# Altium PCB stm32f107rct7_devbrd.PcbDoc
Units mm, origin at the board's own origin, x right, y up, seen from the top; angles counter-clockwise.
Board outline 80 x 80 mm, 2 copper layers (Top Layer, Bottom Layer); 39 components, 65 nets, 217 pads, 18 vias.
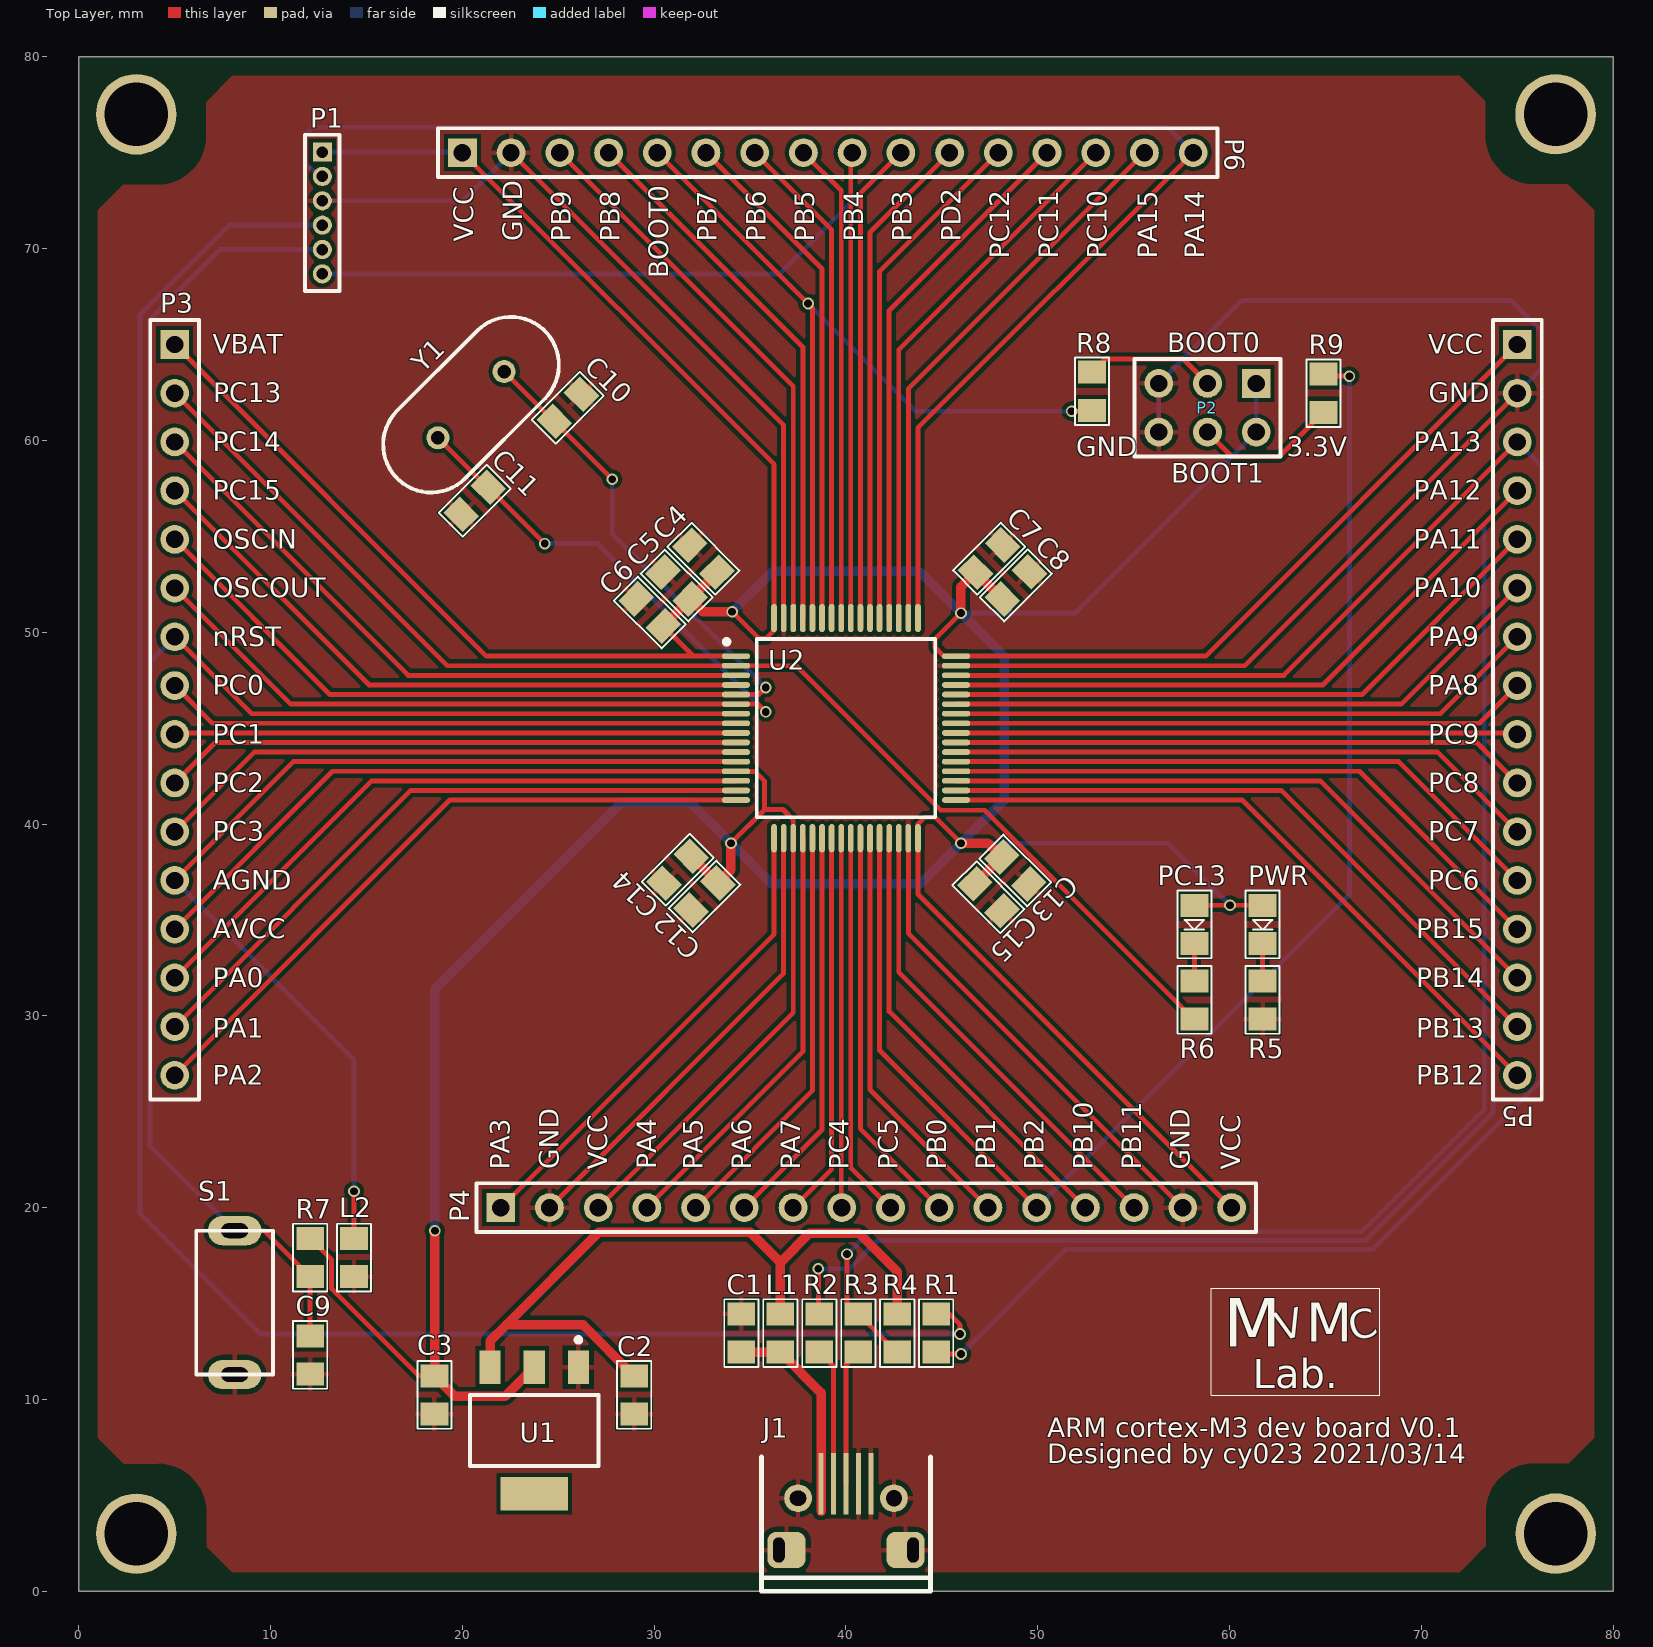
[diagram p0: Top Layer view]
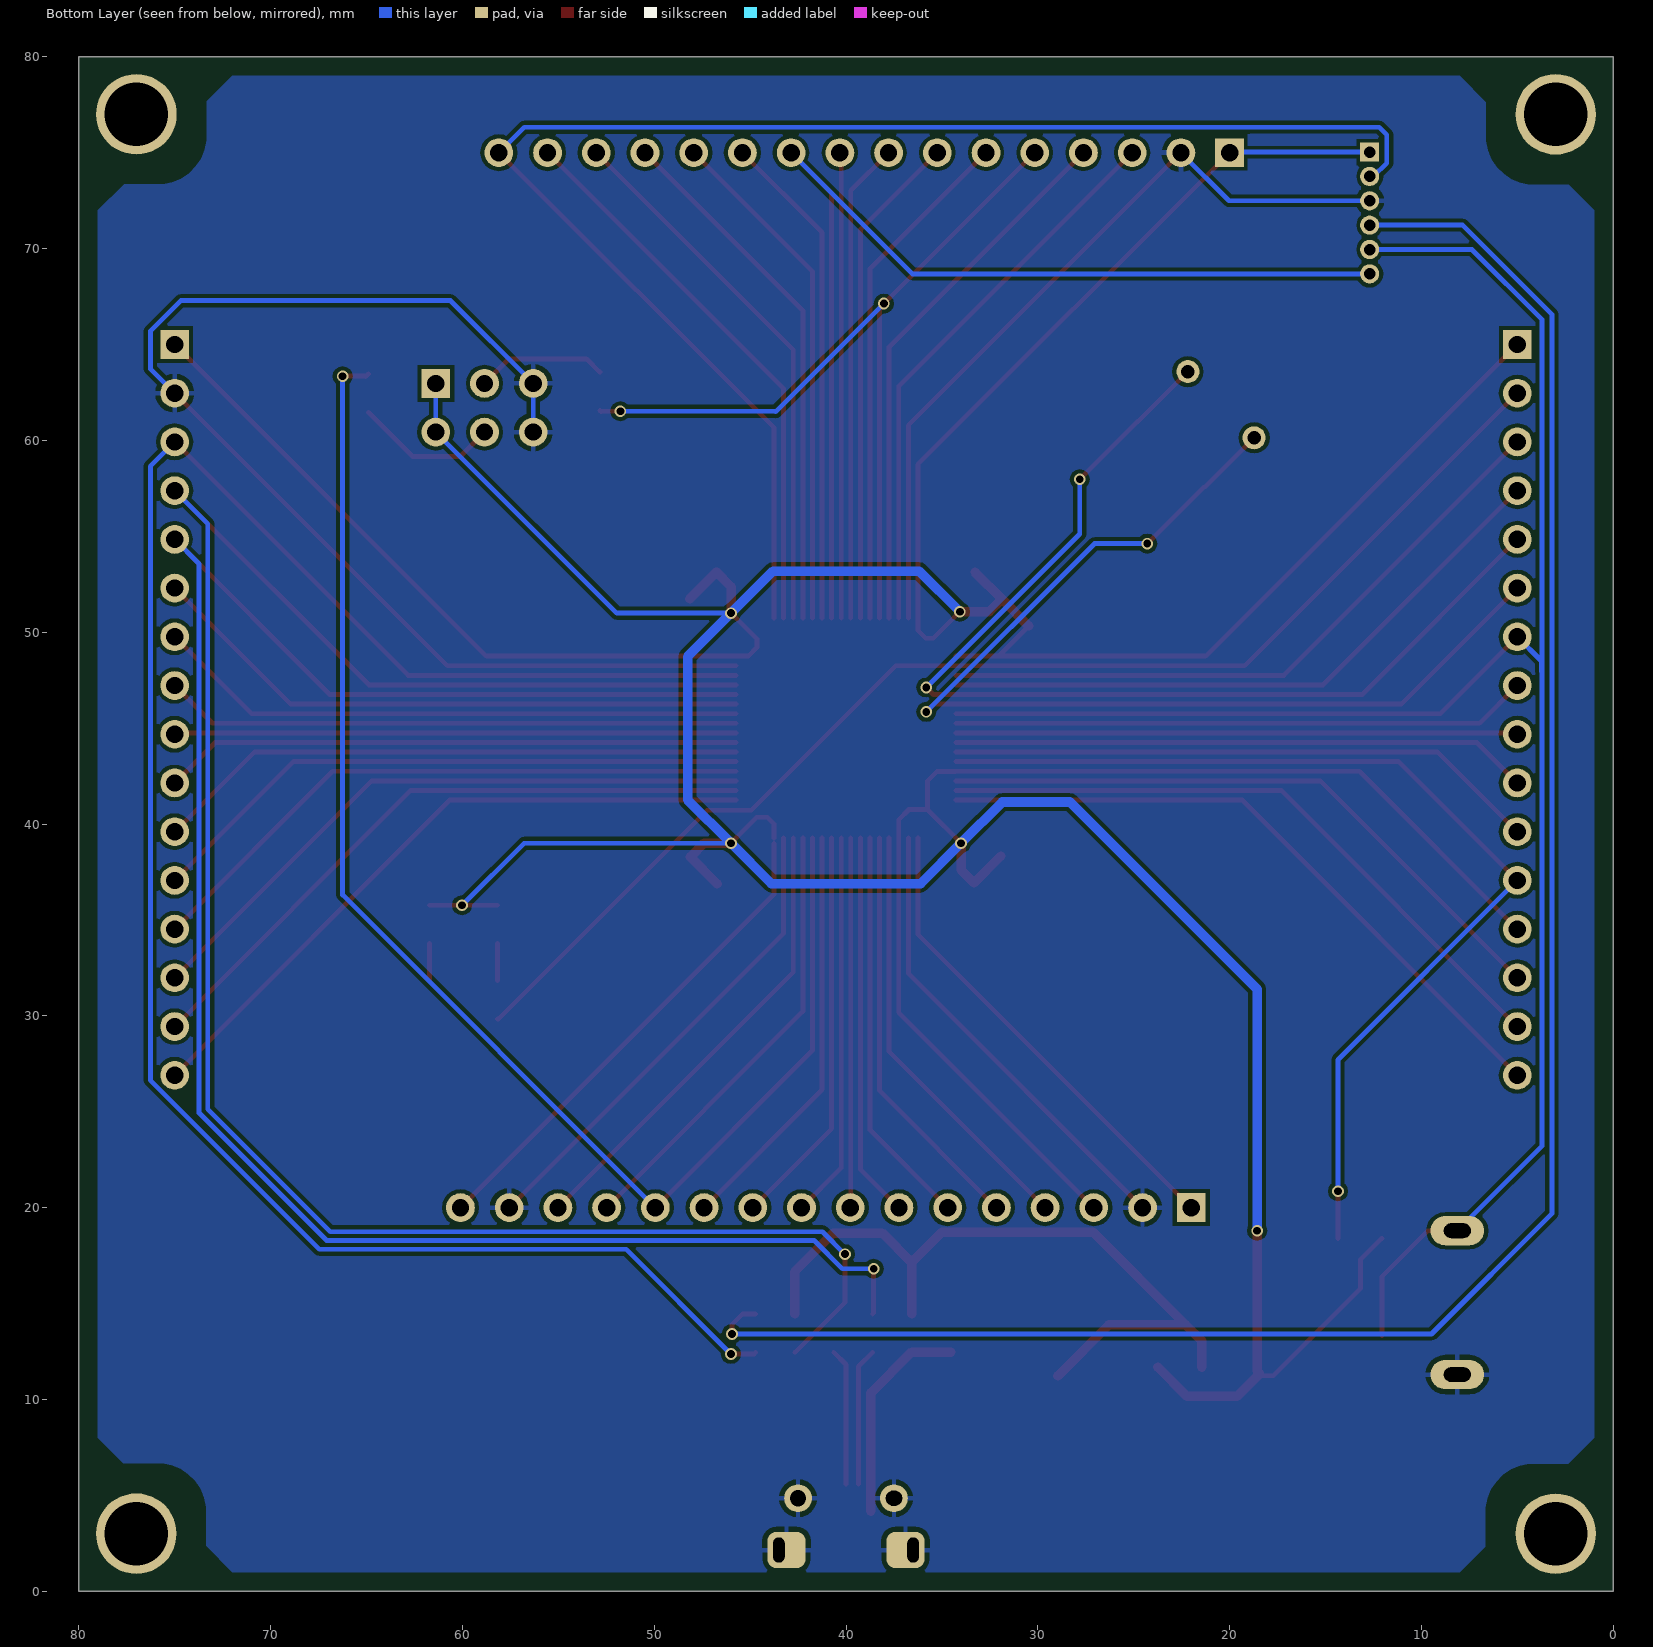
[diagram p1: Bottom Layer view, seen from below]
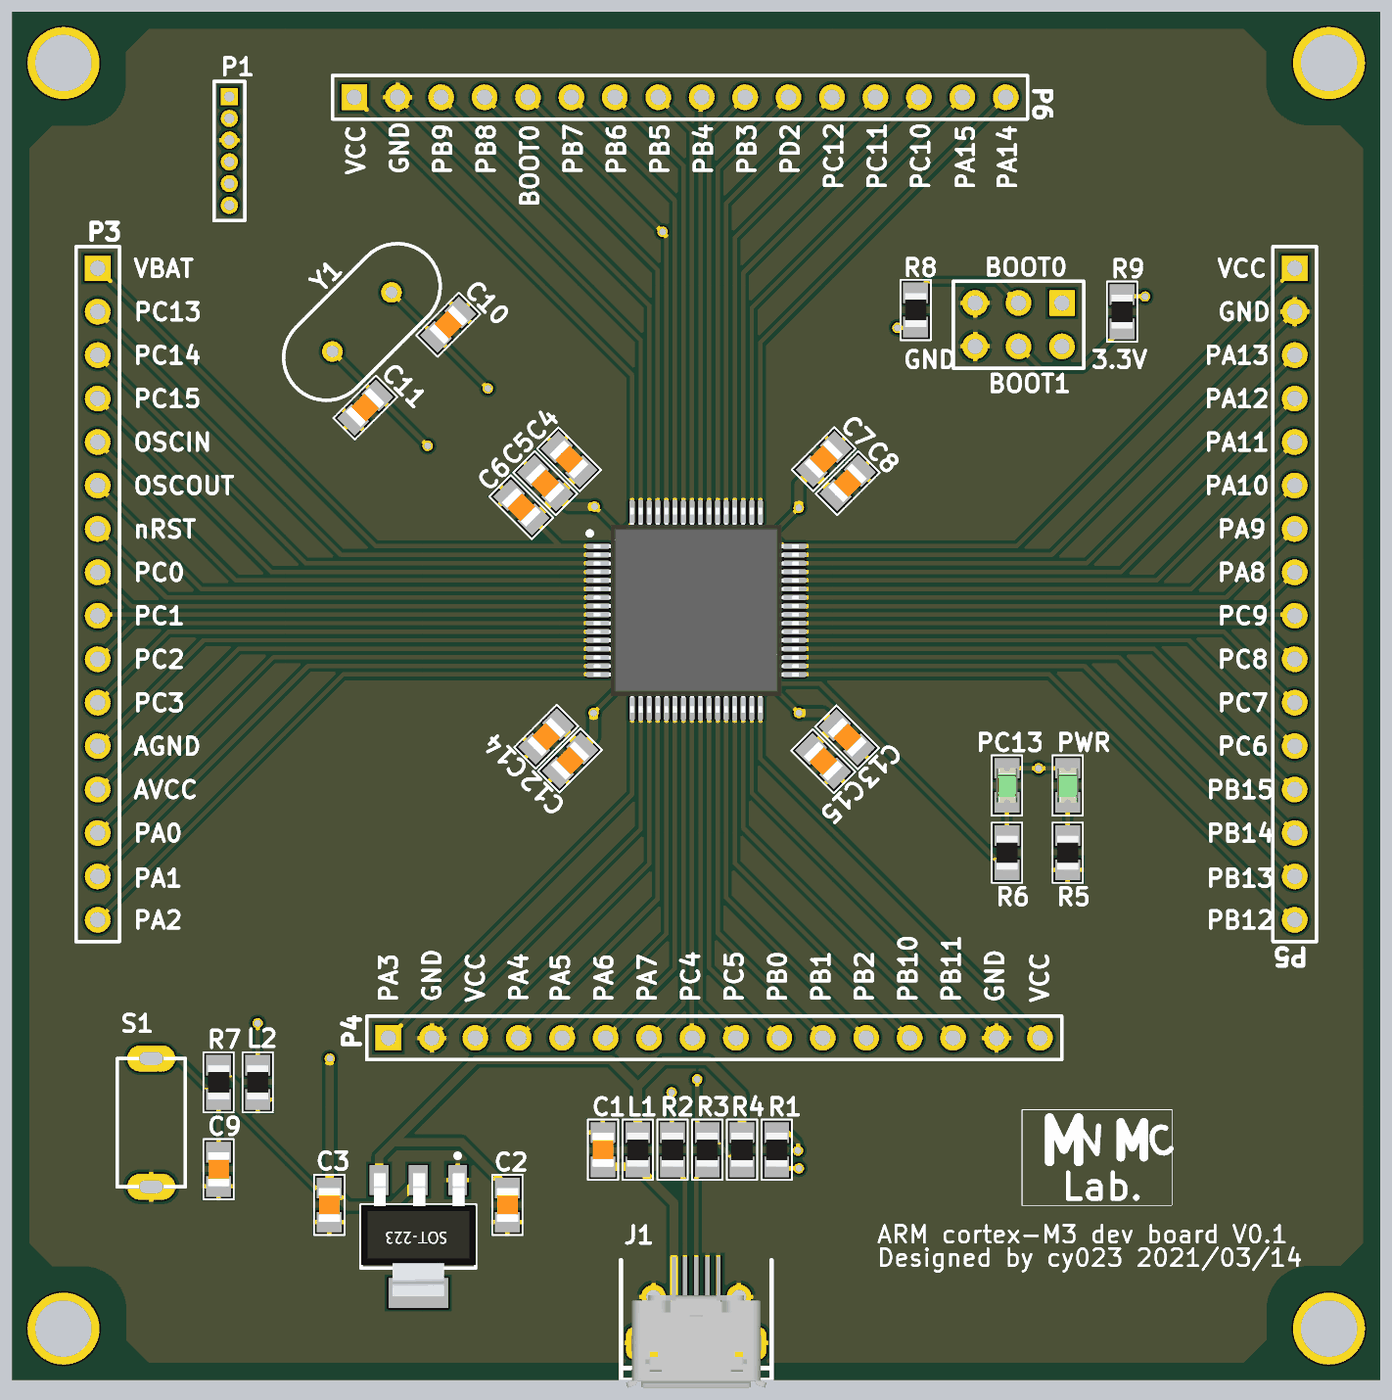
[diagram p2: 3D render of the assembled board from above, using the file's embedded part models]

## Layer stack, top to bottom
Top Solder: solder mask 0.0102, Solder Resist, Dk 3.5
Top Layer: signal copper 0.0356
Dielectric 1: dielectric 0.32, FR-4, Dk 4.8
Bottom Layer: signal copper 0.0356
Bottom Solder: solder mask 0.0102, Solder Resist, Dk 3.5

## Board outline
0,0 80,0 80,80 0,80

## Design rules (kind name [scope] priority, off if disabled: settings)
Clearance [All] p1: gap=0.203 ignorepadtopadclearanceinfootprint=TRUE
HoleSize [All] p1: absolutevalues=TRUE maxlimit=5.08 minlimit=0.254 maxpercent=80.000 minpercent=20.000
MinimumSolderMaskSliver [All] p1: minsoldermaskwidth=0.025
PolygonConnect [All] p1: connectstyle=Relief reliefconductorwidth=0.254 reliefentries=4 polygonreliefangle="90 Angle" airgapwidth=0.254
RoutingVias [All] p1: holewidth=0.406 width=0.61 viastyle="Through Hole" minholewidth=0.406 minwidth=0.61 maxholewidth=1.016 maxwidth=1.27
SilkToSilkClearance [All] p1: silktosilkclearance=0.025
SilkToSolderMaskClearance [IsPad] p1: minsilkscreentomaskgap=0 clearancetoexposedcopper=TRUE
SolderMaskExpansion [All] p1: expansion=0.102
Width [All] p1: maxlimit=1.27 minlimit=0.254 preferedwidth=0.254
26 further rules are at their usual default settings.

## Components (designator, comment, footprint, x,y, rotation, side; value= is the part's Value field where it differs from the comment)
C1 "Cap Semi" SMD0805_CAP 34.544,13.462 r0 top value=10nF
C2 "Cap Semi" SMD0805_CAP 28.956,10.232 r0 top value=10uF
C3 "Cap Semi" SMD0805_CAP 18.542,10.232 r0 top value=10uF
C4 "Cap Semi" SMD0805_CAP 32.565,53.83 r225 top value=4.7uF
C5 "Cap Semi" SMD0805_CAP 31.168,52.433 r225 top value=100nF
C6 "Cap Semi" SMD0805_CAP 29.769,51.029 r225 top value=100nF
C7 "Cap Semi" SMD0805_CAP 47.46,53.838 r135 top value=100nF
C8 "Cap Semi" SMD0805_CAP 48.857,52.441 r135 top value=4.7uF
C9 "Cap Semi" SMD0805_CAP 12.065,12.319 r0 top value=100nF
C10 "Cap Semi" SMD0805_CAP 25.498,61.701 r315 top value=22pF
C11 "Cap Semi" SMD0805_CAP 20.648,56.851 r135 top value=22pF
C12 "Cap Semi" SMD0805_CAP 32.621,36.22 r315 top value=100nF
C13 "Cap Semi" SMD0805_CAP 48.821,37.577 r45 top value=100nF
C14 "Cap Semi" SMD0805_CAP 31.224,37.617 r315 top value=4.7uF
C15 "Cap Semi" SMD0805_CAP 47.424,36.18 r45 top value=4.7uF
J1 "MicroUSB_B" micro_usb_molex_105017-0001 40,0 r90 top
L1 "Bead" SMD0805 36.576,13.462 r0 top
L2 "Bead" SMD0805 14.351,17.399 r0 top value=10mH
P1 "ISP" ISP 11.8,75.932 r270 top
P2 "Header 3X2" HDR2X3 61.387,62.972 r180 top
P3 "Header 16" HDR1X16 5,65 r270 top
P4 "Header 16" HDR1X16 22,20 r0 top
P5 "Header 16" HDR1X16 75,65 r270 top
P6 "Header 16" HDR1X16 20,75 r0 top
PC13 "LED0" LED 58.166,34.763 r270 top
PWR "LED0" LED 61.722,34.763 r270 top
R1 "Res Semi" SMD0805 44.704,13.462 r0 top value=22R
R2 "Res Semi" SMD0805 38.608,13.462 r0 top value=22R
R3 "Res Semi" SMD0805 40.64,13.462 r0 top value=22R
R4 "Res Semi" SMD0805 42.672,13.462 r180 top value=1K
R5 "Res Semi" SMD0805 61.722,30.826 r0 top value=1K
R6 "Res Semi" SMD0805 58.166,30.826 r0 top value=1K
R7 "Res Semi" SMD0805 12.065,17.399 r0 top value=10K
R8 "Res Semi" SMD0805 52.832,62.56 r0 top value=100K
R9 "Res Semi" SMD0805 64.897,62.464 r0 top value=100K
S1 "SW-PB" button_small 8.128,11.296 r180 top
U1 "NCP1117" SOT-223-2 23.749,8.382 r180 top
U2 "STM32F107RCT7" QFP50P1200X1200X160-64N 40,45 r0 top
Y1 "8MHz" XTAL 20.45,61.861 r225 top

## Footprints (in the part's own frame and the unit in brackets; to place one, negate y for a bottom-side part, rotate by r counter-clockwise, add the part's x,y. Pads: shape width x height; smd on the part's side, far side on the other; paste and mask are expansions set on the pad)
button_small [mil]
  oval 110.24x60 hole 30 slot 55.12 at 0 deg: 1(0,0) 2(0,-295.28)
  silkscreen extent -79,-295 79,0
HDR1X16 [mm] "Connector; Header; 16 Position"
  rect 1.5x1.5 hole 0.9: 1(0,0)
  round 1.5 hole 0.9: 2(2.54,0) 3(5.08,0) 4(7.62,0) 5(10.16,0) 6(12.7,0) 7(15.24,0) 8(17.78,0) 9(20.32,0) 10(22.86,0) 11(25.4,0) 12(27.94,0) 13(30.48,0) 14(33.02,0) 15(35.56,0) 16(38.1,0)
  silkscreen extent -1.27,-1.27 39.37,1.27
HDR2X3 [mm] "Connector; Header; 3x2 Position"
  rect 1.5x1.5 hole 0.9: 1(0,0)
  round 1.5 hole 0.9: 2(0,2.54) 3(2.54,0) 4(2.54,2.54) 5(5.08,0) 6(5.08,2.54)
  silkscreen extent -1.27,-1.27 6.35,3.81
ISP [mm]
  rect 1x1 hole 0.6: 1(0.9,0.9)
  round 1 hole 0.6: 2(2.17,0.9) 3(3.44,0.9) 4(4.71,0.9) 5(5.98,0.9) 6(7.25,0.9)
  silkscreen extent 0,0 8.15,1.8
LED [mm]
  rect 1.2x1.45 smd: 1(-1,0) 2(1,0)
  silkscreen extent -1.76,-0.89 1.76,0.89, body extent -2.54,-0.62 1.01,0.62, height 1.1
micro_usb_molex_105017-0001 [mm]
  rect 3.2x0.25 smd: 1(5.6,1.3) 2(5.6,0.65) 3(5.6,0) 4(5.6,-0.65) 5(5.6,-1.3)
  rrect50% 1.9x2 hole 0.6 slot 1.3 at 0 deg copper offset 0,-0.4: 5(2.15,3.5)
  rrect50% 1.9x2 hole 0.6 slot 1.3 at 0 deg copper offset 0,0.4: 5(2.15,-3.5)
  round 1.45 hole 0.85: 5(4.85,-2.5)
  round 1.45 hole 0.85 slot 0.8 at 0 deg: 5(4.85,2.5)
  silkscreen extent 0,-4.4 7,4.4, body extent -0.45,-4.1 4.95,4.1, height 2.78
QFP50P1200X1200X160-64N [mm]
  oval 1.475x0.3 smd: 1(-5.738,3.75) 2(-5.738,3.25) 3(-5.738,2.75) 4(-5.738,2.25) 5(-5.738,1.75) 6(-5.738,1.25) 7(-5.738,0.75) 8(-5.738,0.25) 9(-5.738,-0.25) 10(-5.738,-0.75) 11(-5.738,-1.25) 12(-5.738,-1.75) 13(-5.738,-2.25) 14(-5.738,-2.75) 15(-5.738,-3.25) 16(-5.738,-3.75) 33(5.738,-3.75) 34(5.738,-3.25) 35(5.738,-2.75) 36(5.738,-2.25) 37(5.738,-1.75) 38(5.738,-1.25) 39(5.738,-0.75) 40(5.738,-0.25) 41(5.738,0.25) 42(5.738,0.75) 43(5.738,1.25) 44(5.738,1.75) 45(5.738,2.25) 46(5.738,2.75) 47(5.738,3.25) 48(5.738,3.75)
  oval 0.3x1.475 smd: 17(-3.75,-5.738) 18(-3.25,-5.738) 19(-2.75,-5.738) 20(-2.25,-5.738) 21(-1.75,-5.738) 22(-1.25,-5.738) 23(-0.75,-5.738) 24(-0.25,-5.738) 25(0.25,-5.738) 26(0.75,-5.738) 27(1.25,-5.738) 28(1.75,-5.738) 29(2.25,-5.738) 30(2.75,-5.738) 31(3.25,-5.738) 32(3.75,-5.738) 49(3.75,5.738) 50(3.25,5.738) 51(2.75,5.738) 52(2.25,5.738) 53(1.75,5.738) 54(1.25,5.738) 55(0.75,5.738) 56(0.25,5.738) 57(-0.25,5.738) 58(-0.75,5.738) 59(-1.25,5.738) 60(-1.75,5.738) 61(-2.25,5.738) 62(-2.75,5.738) 63(-3.25,5.738) 64(-3.75,5.738)
  silkscreen extent -6.35,-4.65 4.65,4.65, body extent -6,-6 6,6, height 1.6
SMD0805 [mm]
  rect 1.45x1.2 smd: 1(0,-1) 2(0,1)
  silkscreen extent -0.89,-1.76 0.89,1.76, body extent -0.62,-1 0.63,1, height 0.5
SMD0805_CAP [mm]
  rect 1.45x1.2 smd: 1(0,-1) 2(0,1)
  silkscreen extent -0.89,-1.76 0.89,1.76, body extent -0.61,-1 0.64,1, height 0.8
SOT-223-2 [mm] "SOT-223/SC-73; 4 Leads; Body 6.7 x 7.3 mm, inc. leads (LxW max)"
  rect 1.1x1.75 smd: 1(-2.3,-3.3) 2(0,-3.3) 3(2.3,-3.3)
  rect 3.5x1.75 smd: 4(0,3.3)
  silkscreen extent -3.35,-4.85 3.35,1.85, body extent -3.35,-3.7 3.35,3.5, height 1.85
XTAL [mm]
  round 1.2 hole 0.7: 1(-2.44,0) 2(2.44,0)
  silkscreen extent -5.44,-2.5 5.44,2.5

## Part data
C1 C2 C3 C4 C5 C6 C7 C8 C9 C10 C11 C12 C13 C14 C15: "Capacitor (Semiconductor SIM Model)", LatestRevisionDate=29-May-2009, LatestRevisionNote="IPC-7351 Footprint Added.", PackageDescription="Chip Capacitor", PackageReference=C1206, Published=8-Jun-2000, Publisher="Altium Limited"
L1 L2: library part Inductor, "Inductor", Code_IEC=1005, Code_JEITA=0402, LatestRevisionDate=29-May-2009, LatestRevisionNote="IPC-7351 Footprint Added.", PackageDescription="Chip Inductor", PackageReference=0402-A, Published=8-Jun-2000, Publisher="Altium Limited"
P1: library part MHDR1X6, "Header, 6-Pin", LatestRevisionDate=17-Jul-2002, LatestRevisionNote="Re-released for DXP Platform.", Publisher="Altium Limited"
P2: "Header, 3-Pin, Dual row", LatestRevisionDate=17-Jul-2002, LatestRevisionNote="Re-released for DXP Platform.", Publisher="Altium Limited"
P3 P4 P5 P6: "Header, 16-Pin", LatestRevisionDate=17-Jul-2002, LatestRevisionNote="Re-released for DXP Platform.", Publisher="Altium Limited"
PC13 PWR: "Typical INFRARED GaAs LED", LatestRevisionDate=08-Jul-2005, LatestRevisionNote="Mech Layer 1 removed.", PackageDescription="LED; 2 Leads", PackageReference=LED-0, Published=8-Jun-2000, Publisher="Altium Limited"
R1 R2 R3 R4 R5 R6 R7 R8 R9: "Semiconductor Resistor", LatestRevisionDate=17-Jul-2002, LatestRevisionNote="Re-released for DXP Platform.", PackageDescription="Axial Device, Thru-Hole; 2 Leads; 0.5 in Pin Spacing", PackageReference=AXIAL-0.5, Published=8-Jun-2000, Publisher="Altium Limited"
S1: "Switch", LatestRevisionDate=17-Jul-2002, LatestRevisionNote="Re-released for DXP Platform.", PackageDescription="Switch; 2 Leads", PackageReference=SPST-2, Published=24-Mar-1999, Publisher="Altium Limited"
U1: "IC REG 5V 1A DPAC"
U2: "Integrated Circuit", Manufacturer_Name=STMicroelectronics, Mouser2 Part Number=511-STM32F107RCT7, Datasheet Link=https://componentsearchengine.com//STM32F107RCT7.pdf, Height=1.6mm, Manufacturer_Part_Number=STM32F107RCT7, Mouser2 Price/Stock=https://www.mouser.com/Search/Refine.aspx?Keyword=511-STM32F107RCT7
Y1: library part XTAL, "Crystal Oscillator", LatestRevisionDate=17-Jul-2002, LatestRevisionNote="Re-released for DXP Platform.", PackageDescription="Crystal, Thru-Hole; 2 Leads; Body 3.1 x 8.2 mm (Dia.xH)", PackageReference=R38, Published=8-Jun-2000, Publisher="Altium Limited"

## Free pads (board coordinates)
  round 4.2 hole 3.3: ""(3,3) ""(3,77) ""(76.999,77.001) ""(77.001,3.001)

## Via types
v1: diameter 0.61, hole 0.41, Top Layer to Bottom Layer, 18 vias

## Nets (pads, with @x,y where several pads share a name; then routed paths per layer and width w, separated by ;. In a path a pad name is that pad's centre, name@x,y a point inside that pad or via, vN(x,y) a via of type N, cw(c..) or ccw(c..) an arc to the next point about the centre after c; other vN are vias at no path point)
AGND: L2.2 P3.12 U2.12 | length 54.4
  Top Layer w0.254: P3.12 11.19,43.25 U2.12 ; L2.2 v1(14.351,20.853)
  Bottom Layer w0.254: P3.12 14.351,27.709 v1(14.351,20.853)
BOOT0: P6.5 R8.1 U2.60 | length 44.8
  Top Layer w0.254: P6.5 v1(38.028,67.132) 38.25,66.91 U2.60 ; v1(51.765,61.519) 52.74,61.519 52.765,61.493 R8.1
  Bottom Layer w0.254: v1(38.028,67.132) 43.667,61.493 43.692,61.519 v1(51.765,61.519)
BOOT1: P4.12 R9.2 U2.28 | length 74.2
  Top Layer w0.254: U2.28 41.75,28.19 P4.12 ; R9.2 65.039,63.322 65.064,63.348 v1(66.243,63.348)
  Bottom Layer w0.254: P4.12 66.243,36.303 v1(66.243,63.348)
GND: C1.2 C2.1 C3.1 C4.1 C5.1 C6.1 C7.1 C8.1 C9.1 C10.2 C11.2 C12.1 C13.1 C14.1 C15.1 J1.4 J1.5 L2.1 P1.3 P2.5 P2.6 P4.2 P4.15 P5.2 P6.2 R5.1 S1.1 U1.1 U2.18 U2.31 U2.47 U2.63 | length 154.4
  Top Layer w0.254: P6.2 36.75,60.79 U2.63 ; P4.2 36.75,32.21 U2.18 ; U2.31 43.25,34.31 P4.15 ; U2.47 60.79,48.25 P5.2
  Bottom Layer w0.254: P1.3 20.032,72.492 P6.2 ; P2.6 P2.5 60.62,67.285 74.682,67.285 76.27,65.697 76.27,63.73 P5.2
NetJ1_2: J1.2 R2.1 | length 7.2
  Top Layer w0.254: R2.1 39.35,11.72 J1.2
NetJ1_3: J1.3 R3.1 | length 7.1
  Top Layer w0.254: J1.3 40,11.822 R3.1
NetP1_4: P1.4 R1.2 | length 105.6
  Top Layer w0.254: R1.2 45.38,14.462 45.949,13.894 v1(45.949,13.411)
  Bottom Layer w0.254: P1.4 7.849,71.222 3.2,66.573 3.2,19.685 9.474,13.411 v1(45.949,13.411)
NetP2_3: P2.3 R8.2 | length 6.8
  Top Layer w0.254: R8.2 53.513,64.242 57.577,64.242 P2.3
NetP2_4: P2.4 R9.1 | length 7.5
  Top Layer w0.254: P2.4 60.117,59.162 62.595,59.162 R9.1
NetPC13_2: PC13.2 R6.2 | length 1.9
  Top Layer w0.254: R6.2 PC13.2
NetPWR_2: PWR.2 R5.2 | length 1.9
  Top Layer w0.254: R5.2 PWR.2
nRST: C9.2 P1.5 P3.7 R7.1 S1.2 U2.7 | length 101.1
  Top Layer w0.254: P3.7 9.01,45.75 U2.7 ; S1.2 9.668,18.796 R7.1 C9.2
  Bottom Layer w0.254: 3.74,47.955 3.74,48.5 P3.7 ; S1.2 3.708,23.216 3.708,47.955 3.708,66.294 7.366,69.952 P1.5
OSCIN: C10.1 P3.5 U2.5 Y1.1 | length 56.4
  Top Layer w0.254: P3.5 13.09,46.75 U2.5 35.447,46.75 v1(35.814,47.117) ; Y1.1 24.768,60.994 C10.1 v1(27.813,57.971)
  Bottom Layer w0.254: v1(27.813,57.971) 27.813,55.118 v1(35.814,47.117)
OSCOUT: C11.1 P3.6 U2.6 Y1.2 | length 56.5
  Top Layer w0.254: P3.6 11.05,46.25 U2.6 35.411,46.25 v1(35.814,45.847) ; Y1.2 21.302,57.559 C11.1 v1(24.296,54.618)
  Bottom Layer w0.254: v1(24.296,54.618) 27.043,54.618 v1(35.814,45.847)
PA0: P3.14 U2.14 | length 33.5
  Top Layer w0.254: P3.14 15.27,42.25 U2.14
PA1: P3.15 U2.15 | length 34.4
  Top Layer w0.254: P3.15 17.31,41.75 U2.15
PA2: P3.16 U2.16 | length 35.2
  Top Layer w0.254: P3.16 19.35,41.25 U2.16
PA3: P4.1 U2.17 | length 25.2
  Top Layer w0.254: P4.1 36.25,34.25 U2.17
PA4: P4.4 U2.20 | length 22.6
  Top Layer w0.254: P4.4 37.75,28.13 U2.20
PA5: P4.5 U2.21 | length 21.8
  Top Layer w0.254: P4.5 38.25,26.09 U2.21
PA6: P4.6 U2.22 | length 20.9
  Top Layer w0.254: P4.6 38.75,24.05 U2.22
PA7: P4.7 U2.23 | length 20.1
  Top Layer w0.254: P4.7 39.25,22.01 U2.23
PA8: P5.8 U2.41 | length 30.1
  Top Layer w0.254: U2.41 73.03,45.25 P5.8
PA9: P5.7 U2.42 | length 30.9
  Top Layer w0.254: U2.42 70.99,45.75 P5.7
PA10: P5.6 U2.43 | length 31.8
  Top Layer w0.254: U2.43 68.95,46.25 P5.6
PA11: P5.5 R2.2 U2.44 | length 104
  Top Layer w0.254: v1(38.557,16.815) 38.557,14.513 R2.2 ; U2.44 66.91,46.75 P5.5
  Bottom Layer w0.254: v1(38.557,16.815) 40.192,16.815 41.665,18.288 67.081,18.288 73.73,24.937 73.73,53.57 P5.5
PA12: P5.4 R3.2 R4.2 U2.45 | length 109
  Top Layer w0.254: v1(40.056,17.577) 40.056,15.046 R3.2 42.64,12.462 R4.2 ; U2.45 64.87,47.25 P5.4
  Bottom Layer w0.254: v1(40.056,17.577) 41.224,18.745 66.892,18.745 73.273,25.126 73.273,55.653 P5.4
PA13: P5.3 R1.1 U2.46 | length 105.6
  Top Layer w0.254: R1.1 44.796,12.37 v1(46,12.37) ; U2.46 62.83,47.75 P5.3
  Bottom Layer w0.254: v1(46,12.37) 51.461,17.831 67.462,17.831 76.27,26.638 76.27,58.65 P5.3
PA14: P1.2 P6.16 U2.49 | length 79.9
  Top Layer w0.254: U2.49 43.75,60.65 P6.16
  Bottom Layer w0.254: P1.2 12.503,73.762 11.811,74.454 11.811,75.934 12.204,76.327 56.773,76.327 P6.16
PA15: P6.15 U2.50 | length 29.4
  Top Layer w0.254: U2.50 43.25,62.69 P6.15
PB0: P4.10 U2.26 | length 21
  Top Layer w0.254: U2.26 40.75,24.11 P4.10
PB1: P4.11 U2.27 | length 21.8
  Top Layer w0.254: U2.27 41.25,26.15 P4.11
PB3: P1.6 P6.10 U2.55 | length 57.9
  Top Layer w0.254: U2.55 40.75,72.89 P6.10
  Bottom Layer w0.254: P1.6 36.542,68.682 P6.10
PB4: P6.9 U2.56 | length 24.3
  Top Layer w0.254: U2.56 40.25,74.93 P6.9
PB5: P6.8 U2.57 | length 25.1
  Top Layer w0.254: P6.8 39.75,73.03 U2.57
PB6: P6.7 U2.58 | length 25.9
  Top Layer w0.254: P6.7 39.25,70.99 U2.58
PB7: P6.6 U2.59 | length 26.8
  Top Layer w0.254: P6.6 38.75,68.95 U2.59
PB8: P6.4 U2.61 | length 28.5
  Top Layer w0.254: P6.4 37.75,64.87 U2.61
PB9: P6.3 U2.62 | length 29.3
  Top Layer w0.254: P6.3 37.25,62.83 U2.62
PB10: P4.13 U2.29 | length 23.5
  Top Layer w0.254: U2.29 42.25,30.23 P4.13
PB11: P4.14 U2.30 | length 24.3
  Top Layer w0.254: U2.30 42.75,32.27 P4.14
PB12: P5.16 U2.33 | length 35.2
  Top Layer w0.254: U2.33 60.65,41.25 P5.16
PB13: P5.15 U2.34 | length 34.4
  Top Layer w0.254: U2.34 62.69,41.75 P5.15
PB14: P5.14 U2.35 | length 33.5
  Top Layer w0.254: U2.35 64.73,42.25 P5.14
PB15: P5.13 U2.36 | length 32.7
  Top Layer w0.254: U2.36 66.77,42.75 P5.13
PC0: P3.8 U2.8 | length 30.1
  Top Layer w0.254: P3.8 6.97,45.25 U2.8
PC1: P3.9 U2.9 | length 29.3
  Top Layer w0.254: P3.9 5.07,44.75 U2.9
PC2: P3.10 U2.10 | length 30.1
  Top Layer w0.254: P3.10 7.11,44.25 U2.10
PC3: P3.11 U2.11 | length 31
  Top Layer w0.254: P3.11 9.15,43.75 U2.11
PC4: P4.8 U2.24 | length 19.3
  Top Layer w0.254: U2.24 39.75,20.03 P4.8
PC5: P4.9 U2.25 | length 20.1
  Top Layer w0.254: U2.25 40.25,22.07 P4.9
PC6: P5.12 U2.37 | length 31.8
  Top Layer w0.254: U2.37 68.81,43.25 P5.12
PC7: P5.11 U2.38 | length 31
  Top Layer w0.254: U2.38 70.85,43.75 P5.11
PC8: P5.10 U2.39 | length 30.1
  Top Layer w0.254: U2.39 72.89,44.25 P5.10
PC9: P5.9 U2.40 | length 29.3
  Top Layer w0.254: U2.40 74.93,44.75 P5.9
PC10: P6.14 U2.51 | length 28.5
  Top Layer w0.254: U2.51 42.75,64.73 P6.14
PC11: P6.13 U2.52 | length 27.7
  Top Layer w0.254: U2.52 42.25,66.77 P6.13
PC12: P6.12 U2.53 | length 26.8
  Top Layer w0.254: U2.53 41.75,68.81 P6.12
PC13: P3.2 R6.1 U2.2 | length 66.7
  Top Layer w0.254: P3.2 19.21,48.25 U2.2 37.4,48.25 44.931,40.719 47.243,40.719 58.136,29.826 R6.1
PC14: P3.3 U2.3 | length 34.3
  Top Layer w0.254: P3.3 17.17,47.75 U2.3
PC15: P3.4 U2.4 | length 33.5
  Top Layer w0.254: P3.4 15.13,47.25 U2.4
PD2: P6.11 U2.54 | length 26
  Top Layer w0.254: U2.54 41.25,70.85 P6.11
VBUS: C1.1 J1.1 L1.1 | length 11.2
  Top Layer w0.5: C1.1 L1.1 38.7,10.338 J1.1 J1.1@38.7,4.166
VCC3V3: C3.2 C4.2 C5.2 C6.2 C7.2 C8.2 C12.2 C13.2 C14.2 C15.2 P1.1 P2.1 P2.2 P3.1 P3.13 P4.3 P4.16 P5.1 P6.1 PC13.1 PWR.1 R7.2 U1.2 U2.1 U2.13 U2.19 U2.32 U2.48 U2.64 | length 372.5
  Top Layer w0.254: P3.13 13.23,42.75 U2.13 34.282,42.73 35.261,42.73 35.755,42.236 35.755,40.755 ; P3.1 21.25,48.75 32.047,48.75 ; R7.2 13.183,17.281 13.183,15.775 17.726,11.232 C3.2 ; P6.1 36.25,58.75 U2.64 36.25,50.093 35.839,49.682 35.447,49.682 v1(34.065,51.065) ; P4.3 37.25,30.17 U2.19 37.25,40.22 36.715,40.755 35.755,40.755 ; C6.2@30.476,50.327 C6.2 32.047,48.75 ; v1(34,39) 35.755,40.755 ; U2.1 32.047,48.75 ; U2.32@43.75,39 43.75,36.35 P4.16 ; U2.32 43.75,39.991 44.109,40.35 44.65,40.35 v1(46,39) ; v1(45.992,50.992) 44.65,49.65 44.65,49.203 45.103,48.75 U2.48 58.75,48.75 P5.1 ; PC13.1 v1(60.02,35.763) PWR.1
  Top Layer w0.5: v1(18.567,18.796) 18.567,11.461 18.44,11.334 C3.2 19.614,10.16 22.227,10.16 U1.2 ; C6.2@30.476,50.327 C5.2 ; C14.2 C12.2 34,37.599 v1(34,39) ; C4.2 C5.2 ; v1(34.065,51.065) 32.537,51.065 C5.2 ; v1(45.992,50.992) 45.992,52.37 C7.2 C8.2 ; v1(46,39) 47.398,39 C13.2 C15.2
  Bottom Layer w0.254: P1.1 19.968,75.032 P6.1 ; v1(45.992,50.992) 51.947,50.992 P2.2 P2.1 ; v1(46,39) 56.783,39 v1(60.02,35.763)
  Bottom Layer w0.5: v1(18.567,18.796) 18.567,31.389 28.326,41.148 31.852,41.148 v1(34,39) 36.113,36.887 43.887,36.887 v1(46,39) 48.26,41.26 48.26,48.725 v1(45.992,50.992) 43.797,53.188 36.188,53.188 v1(34.065,51.065)
VCC5V: C2.2 L1.2 R4.1 U1.3 | length 39.7
  Top Layer w0.5: U1.3 21.449,13.052 22.291,13.894 ; C2.2 26.294,13.894 22.291,13.894 ; L1.2 36.576,17.14 ; R4.1 42.672,16.662 40.665,18.669 38.105,18.669 36.576,17.14 ; 22.291,13.894 27.117,18.72 34.996,18.72 36.576,17.14
pads on no net: U1.4

## Polygon pours and split planes (outlines as drawn)
GND on Top Layer "Top Layer-GND" (solid, pour order 18): 8,79 72,79 79,72 79,8 72,1 8,1 1,8 1,72
GND on Bottom Layer "Bottom Layer-GND" (solid, pour order 16): 8,1 1,8 1,72 8,79 72,79 79,72 79,8 72,1

## Other copper
Top Layer:
  pour cut-out: 80.001,6.676 75.899,6.676 ccw(c75.899,4.136) 73.359,4.136 73.359,0.001 80.001,0.001
  pour cut-out: 73.324,80.001 73.324,75.899 ccw(c75.864,75.899) 75.864,73.359 79.999,73.359 79.999,80.001
  pour cut-out: 6.675,0 6.675,4.102 ccw(c4.135,4.102) 4.135,6.642 0,6.642 0,0
  pour cut-out: 0,73.325 4.102,73.325 ccw(c4.102,75.865) 6.642,75.865 6.642,80 0,80
Bottom Layer:
  pour cut-out: 80.001,6.676 75.899,6.676 ccw(c75.899,4.136) 73.359,4.136 73.359,0.001 80.001,0.001
  pour cut-out: 73.324,80.001 73.324,75.899 ccw(c75.864,75.899) 75.864,73.359 79.999,73.359 79.999,80.001
  pour cut-out: 6.675,0 6.675,4.102 ccw(c4.135,4.102) 4.135,6.642 0,6.642 0,0
  pour cut-out: 0,73.325 4.102,73.325 ccw(c4.102,75.865) 6.642,75.865 6.642,80 0,80

## Silkscreen, mask and mechanical layers (free items; w line width, h text height)
Top Overlay:
  lines w0.051: 59.055,10.206 59.055,15.794 67.818,15.794 67.818,10.206 59.055,10.206
  text "GND" at 23.114,70.387 h1 r90
  text "VCC" at 20.574,70.358 h1 r90
  text "PB9" at 25.654,70.358 h1 r90
  text "PB8" at 28.194,70.358 h1 r90
  text "PB7" at 33.274,70.358 h1 r90
  text "PB6" at 35.814,70.358 h1 r90
  text "PB5" at 38.354,70.358 h1 r90
  text "PB4" at 40.894,70.358 h1 r90
  text "PB3" at 43.434,70.358 h1 r90
  text "PD2" at 45.974,70.358 h1 r90
  text "PC12" at 48.514,69.469 h1 r90
  text "PC11" at 51.054,69.469 h1 r90
  text "PC10" at 53.594,69.469 h1 r90
  text "PA15" at 56.224,69.469 h1 r90
  text "PA14" at 58.674,69.469 h1 r90
  text "BOOT0" at 30.734,68.453 h1 r90
  text "BOOT0" at 56.738,64.591 h1
  text "VBAT" at 6.985,64.516 h1
  text "VCC" at 70.358,64.516 h1
  text "PC13" at 7.014,61.976 h1
  text "GND" at 70.387,61.976 h1
  text "PC14" at 6.985,59.436 h1
  text "PA13" at 69.596,59.436 h1
  text "GND" at 52.004,59.182 h1
  text "3.3V" at 62.992,59.182 h1
  text "BOOT1" at 56.948,57.785 h1
  text "PC15" at 6.985,56.896 h1
  text "PA12" at 69.596,56.896 h1
  text "OSCIN" at 6.985,54.356 h1
  text "PA11" at 69.596,54.356 h1
  text "OSCOUT" at 6.985,51.816 h1
  text "PA10" at 69.596,51.816 h1
  text "nRST" at 6.985,49.276 h1
  text "PA9" at 70.358,49.276 h1
  text "PC0" at 6.985,46.736 h1
  text "PA8" at 70.358,46.736 h1
  text "PC1" at 6.985,44.196 h1
  text "PC9" at 70.358,44.196 h1
  text "PC2" at 6.985,41.656 h1
  text "PC8" at 70.358,41.656 h1
  text "PC3" at 6.985,39.116 h1
  text "PC7" at 70.358,39.116 h1
  text "AGND" at 6.985,36.576 h1
  text "PC6" at 70.358,36.576 h1
  text "AVCC" at 6.985,34.036 h1
  text "PB15" at 69.723,34.036 h1
  text "PA0" at 6.985,31.496 h1
  text "PB14" at 69.723,31.496 h1
  text "PA1" at 6.985,28.866 h1
  text "PB13" at 69.723,28.866 h1
  text "PA2" at 6.985,26.416 h1
  text "PB12" at 69.723,26.416 h1
  text "GND" at 25.019,22 h1 r90
  text "PA4" at 30.099,22 h1 r90
  text "PA3" at 22.479,21.971 h1 r90
  text "VCC" at 27.559,21.971 h1 r90
  text "PA5" at 32.532,21.971 h1 r90
  text "PA6" at 35.072,21.971 h1 r90
  text "PA7" at 37.612,21.971 h1 r90
  text "PC4" at 40.152,21.971 h1 r90
  text "PC5" at 42.692,21.971 h1 r90
  text "PB0" at 45.232,21.971 h1 r90
  text "PB1" at 47.772,21.971 h1 r90
  text "PB2" at 50.312,21.971 h1 r90
  text "PB10" at 52.852,21.971 h1 r90
  text "PB11" at 55.392,21.971 h1 r90
  text "GND" at 57.932,21.971 h1 r90
  text "VCC" at 60.562,21.971 h1 r90
  text "V" at 62.611,13 h1.52 r15
  text "M" at 64.008,13 h2.03
  text "C" at 66.421,13 h1.52 r15
  text "M" at 59.69,12.746 h2.54
  text "Lab." at 61.214,10.587 h1.52
  text "ARM cortex-M3 dev board V0.1" at 50.484,8.04 h1
  text "Designed by cy023 2021/03/14" at 50.484,6.673 h1
Mechanical 1:
  the board outline again, w0.254